# EAGLE board Chainable_RGB_LEDS (EAGLE 7.2.0)
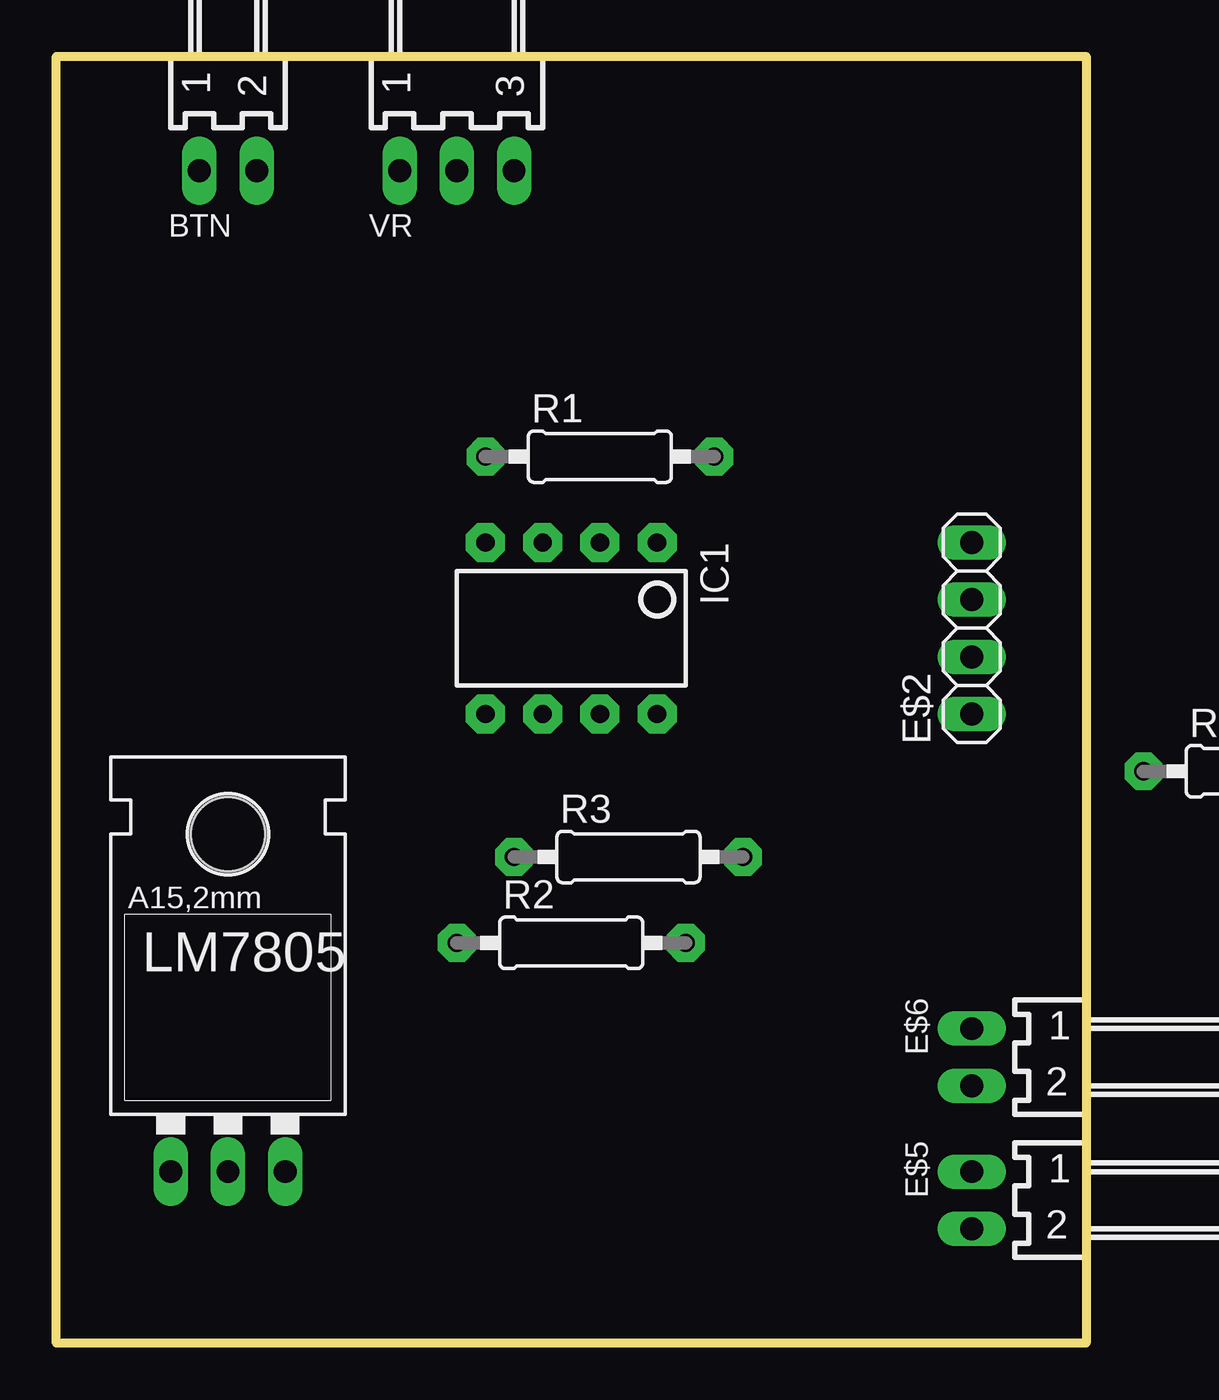
[diagram p0: board, top side]
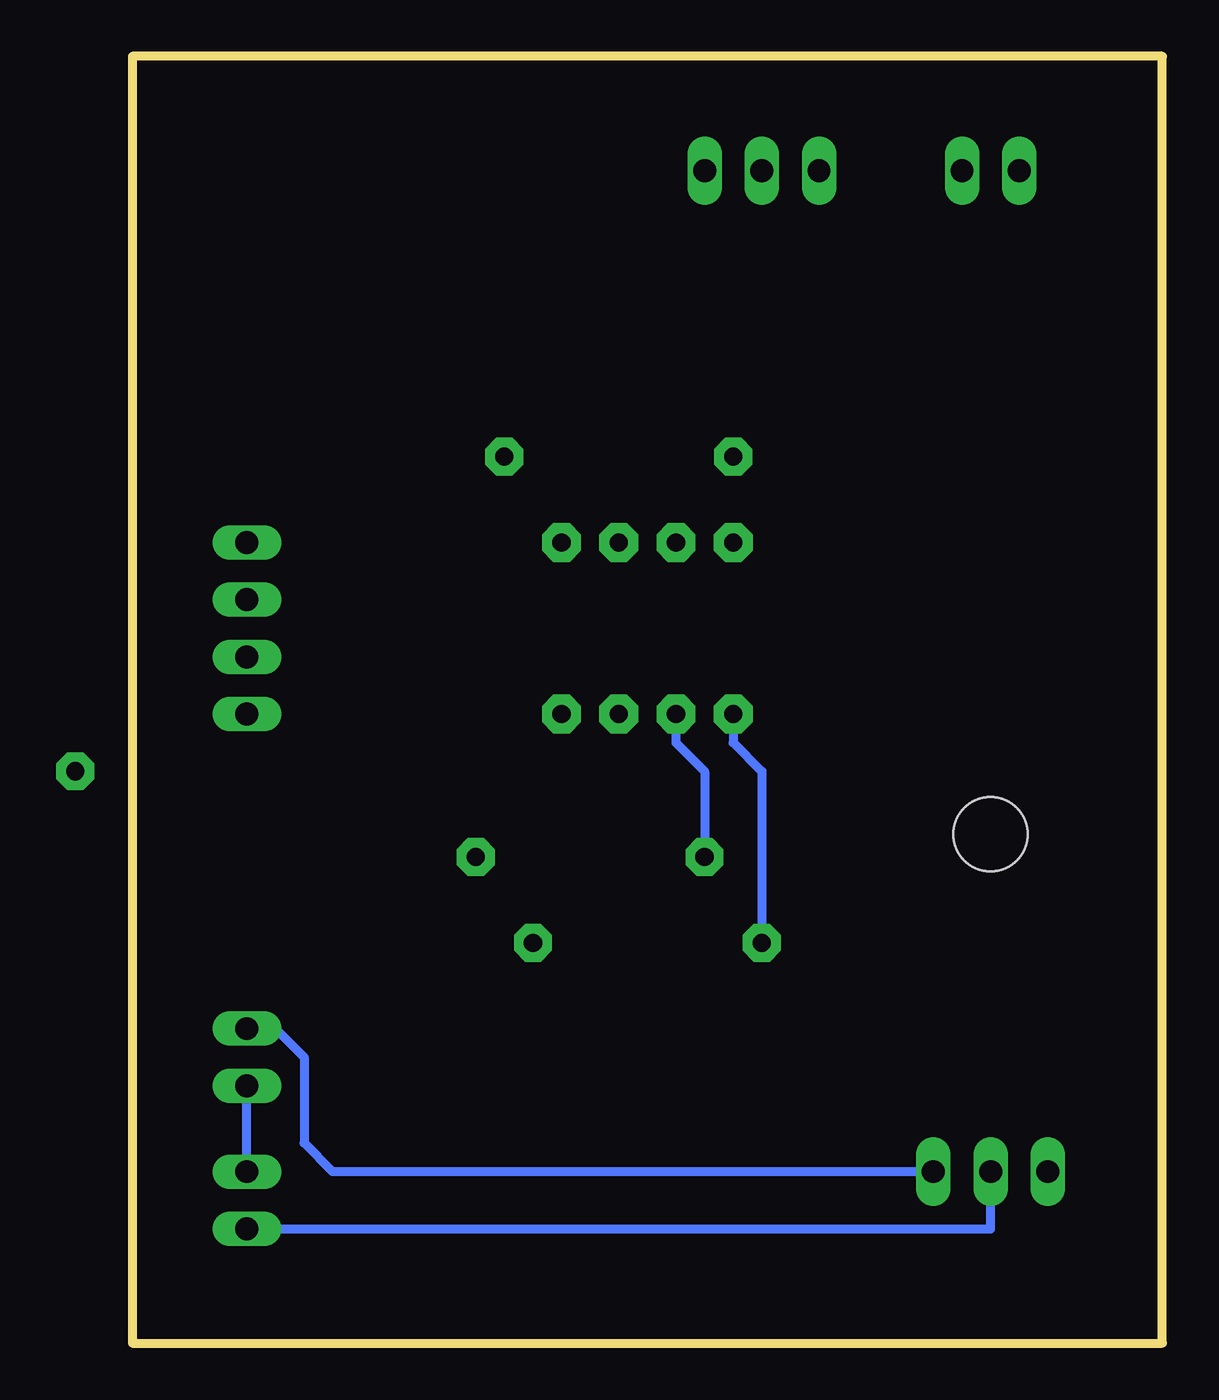
[diagram p1: board, bottom side, seen from below]

Size 45.72 x 57.15 mm. Coordinates in mm from the lower left corner, seen from the top.
Outline: 0,0 0,57.15 45.72,57.15 45.72,0 0,0
Copper layers (1*16): Top 0.035mm / dielectric 1.5mm / Bottom 0.035mm
Design rules "default": minimum track width 10mil, minimum drill 24mil, track to track 8mil, track to pad 8mil, pad to pad 8mil, via to via 8mil, smd to smd 8mil, copper to edge 40mil, drill to drill 8mil, minimum pad ring 10mil, minimum via ring 8mil, stop-mask expansion 4mil, vias tented up to drill 0mil, thermal gap 10mil

## Footprints (pad centres in the part's own frame; a part is rotated, then mirrored left to right if it is on the bottom)
7395-02 = drill 1.016 long: 1 1.27,0; 2 -1.27,0
1X04 = drill 1.016 long: 1 -3.81,0; 2 -1.27,0; 3 1.27,0; 4 3.81,0
1X03 = drill 1.016 long: 1 -2.54,0; 2 0,0; 3 2.54,0
DIP08 = drill 0.813 pad 1.727 octagon: 1 -3.81,-3.81; 2 -1.27,-3.81; 3 1.27,-3.81; 4 3.81,-3.81; 5 3.81,3.81; 6 1.27,3.81; 7 -1.27,3.81; 8 -3.81,3.81
78XXL = drill 1.016 long: GND 0,-3.81; IN -2.54,-3.81; OUT 2.54,-3.81 | hole 3.302: 0,11.176
0207/10 = drill 0.813 pad 1.676 octagon: 1 -5.08,0; 2 5.08,0
7395-03 = drill 1.016 long: 1 2.54,0; 2 0,0; 3 -2.54,0

## Placement (x,y rotation side)
BTN  [7395-02]  7.62,52.07 180 top
E$2  [1X04]  40.64,31.75 90 top
E$5  [7395-02]  40.64,6.35 90 top
E$6  [7395-02]  40.64,12.7 90 top
E$9  [1X03]  57.15,8.89 0 top  (outside the outline)
IC1  ATTINY85  [DIP08]  22.86,31.75 180 top
LM7805  [78XXL]  7.62,11.43 0 top
R1  330  [0207/10]  24.13,39.37 0 top
R2  330  [0207/10]  22.86,17.78 0 top
R3  330  [0207/10]  25.4,21.59 0 top
R4  10K  [0207/10]  53.34,25.4 0 top
VR  [7395-03]  17.78,52.07 180 top

## Library data of the parts
BTN E$5 E$6 VR = con-molex
E$2 E$9 = pinhead
IC1 = SparkFun-DigitalIC
LM7805 = SparkFun-PowerIC
R1-R4 = adafruit

## Nets
S$1: IC1.6 R3.1
S$2: E$5.2 LM7805.GND
S$3: E$6.1 LM7805.OUT
S$5: IC1.5 R2.1
S$6: E$5.1 E$6.2

## Tracks (layer width: path | path; a pad name or v marks a point on that pad's centre or on a via)
S$1
  Bottom 0.406: IC1.6 21.59,26.67 20.32,25.4 R3.1
S$2
  Bottom 0.406: LM7805.GND 7.62,5.08 E$5.2
S$3
  Bottom 0.406: LM7805.OUT 36.83,7.62 38.1,8.89 38.1,12.7 39.37,13.97 E$6.1
S$5
  Bottom 0.406: IC1.5 19.05,26.67 17.78,25.4 R2.1
S$6
  Bottom 0.406: E$5.1 E$6.2